# EAGLE board PATHS 1.1 PCB1 (EAGLE 6.5.0)
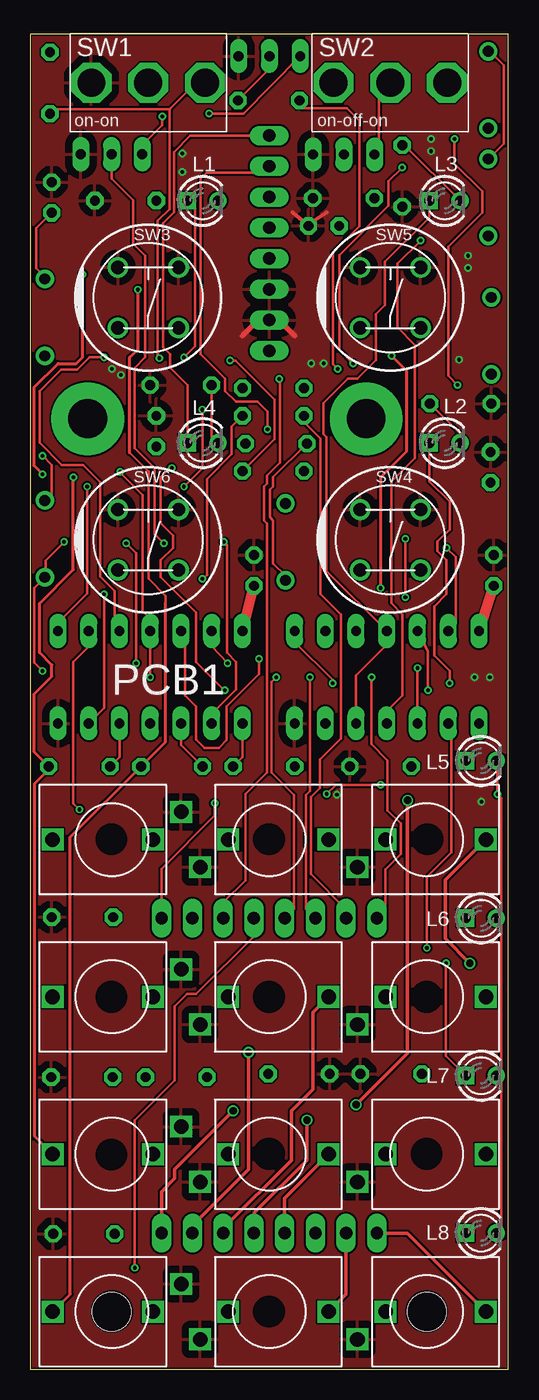
[diagram p0: board, top side]
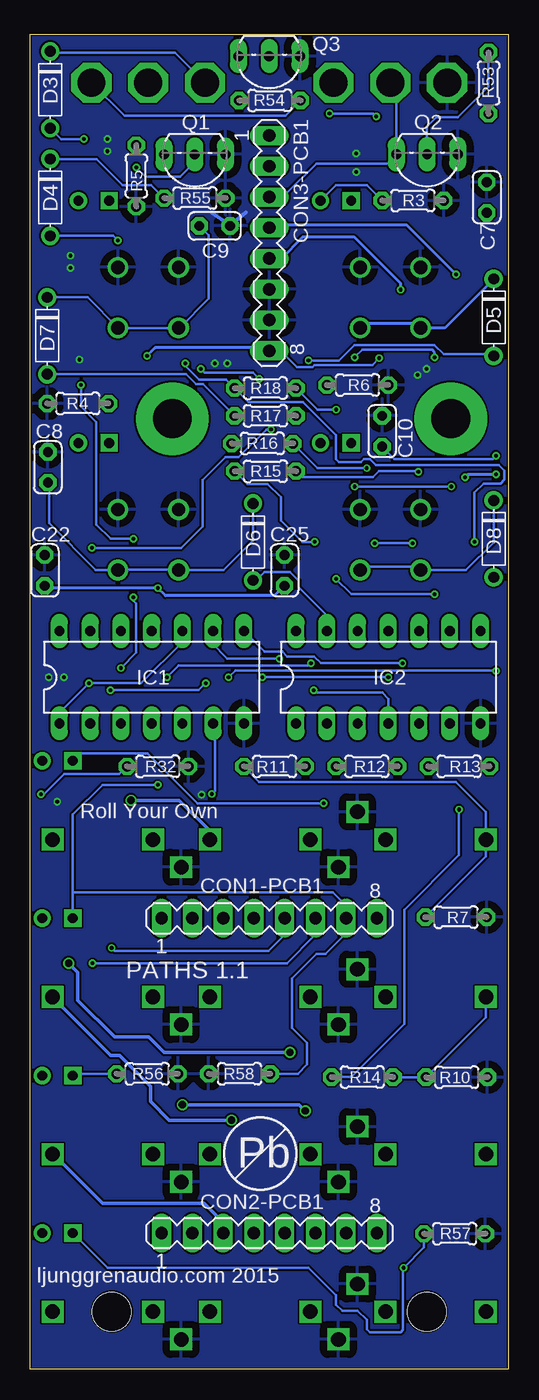
[diagram p1: board, bottom side, seen from below]

Size 39.5 x 110.25 mm. Coordinates in mm from the lower left corner, seen from the top.
Outline: 0,0 39.5,0 39.5,110.25 0,110.25 0,0
Copper layers (1*16): Top 0.035mm / dielectric 1.5mm / Bottom 0.035mm
Design rules "hackvana 15 mil pads 24 mil thermal *": minimum track width 6mil, minimum drill 0.3mm, track to track 6mil, track to pad 6mil, pad to pad 6mil, via to via 6mil, smd to smd 0mil, copper to edge 6mil, drill to drill 6mil, minimum pad ring 12mil, minimum via ring 6mil, stop-mask expansion 2mil, vias tented up to drill 100mil, thermal gap 24mil
Holes 3.2 mm at 6.74,4.76 32.77,4.76
tRestrict: area 18.5,16.6 to 20.9,19; area 5.5,16.5 to 7.9,18.9; area 31.5,16.6 to 33.9,19; area 18.5,3.6 to 20.9,6; area 5.5,29.5 to 7.9,31.9; area 18.5,29.5 to 20.9,31.9; area 31.5,29.5 to 33.9,31.9; area 31.6,42.6 to 34,45; area 18.5,42.6 to 20.9,45; area 5.5,42.6 to 7.9,45

## Footprints (pad centres in the part's own frame; a part is rotated, then mirrored left to right if it is on the bottom)
C025-024X044 = drill 0.813 octagon: 1 -1.27,0; 2 1.27,0
MA08-1 = drill 1.016 long: 1 -8.89,0; 2 -6.35,0; 3 -3.81,0; 4 -1.27,0; 5 1.27,0; 6 3.81,0; 7 6.35,0; 8 8.89,0
DO35-6 = drill 0.9: ANODE 3.175,0; CATHODE -3.175,0
THONKICON-TWISTED = drill 1.2 square: NORMAL 0,-3.4; RING 2.286,-5.715; TIP 0,4.9
DIL14 = drill 0.813 long: 1 -7.62,-3.81; 2 -5.08,-3.81; 3 -2.54,-3.81; 4 0,-3.81; 5 2.54,-3.81; 6 5.08,-3.81; 7 7.62,-3.81; 8 7.62,3.81; 9 5.08,3.81; 10 2.54,3.81; 11 0,3.81; 12 -2.54,3.81; 13 -5.08,3.81; 14 -7.62,3.81
LED3MM = drill 0.813 square: A -1.27,0 | drill 0.813: K 1.27,0
TO92-LINE = drill 0.813 long: 1 2.54,0; 2 0,0; 3 -2.54,0
0204/5 = drill 0.813 octagon: 1 -2.54,0; 2 2.54,0
SPDT-HORIZONTAL-TOP-SUBMINI-MULTICOMP = drill 2.3 pad 3.1 octagon: 1 4.7,0; 2 0,0; 3 -4.7,0
TACTILE_CK = drill 1.1: P$1 -2.5,2.5; P$2 2.5,2.5; P$3 -2.5,-2.5; P$4 2.5,-2.5

## Placement (x,y rotation side)
C7  10nF  [C025-024X044]  1.78,96.77 90 bottom
C8  10nF  [C025-024X044]  38.04,74.49 90 bottom
C9  10nF  [C025-024X044]  24.26,94.42 0 bottom
C10  10nF  [C025-024X044]  10.42,77.47 90 bottom
C22  100nF  [C025-024X044]  38.29,65.98 90 bottom
C25  100nF  [C025-024X044]  18.48,65.98 90 bottom
CON1-PCB1  [MA08-1]  19.75,37.24 0 bottom
CON2-PCB1  [MA08-1]  19.75,11.24 0 bottom
CON3-PCB1  [MA08-1]  19.75,93 270 bottom
D3  1N4148  [DO35-6]  37.85,105.66 270 bottom
D4  1N4148  [DO35-6]  37.85,96.77 270 bottom
D5  1N4148  [DO35-6]  1.21,86.87 270 bottom
D6  1N4148  [DO35-6]  21.09,68.33 270 bottom
D7  1N4148  [DO35-6]  38.1,85.34 270 bottom
D8  1N4148  [DO35-6]  1.21,68.58 270 bottom
FWD  ERTHENVAR_3.5MM_JACKINLINE2  [THONKICON-TWISTED]  6.75,4.75 90 top
HLD  ERTHENVAR_3.5MM_JACKINLINE2  [THONKICON-TWISTED]  6.75,43.75 90 top
I/O1  ERTHENVAR_3.5MM_JACKINLINE2  [THONKICON-TWISTED]  19.75,43.75 270 top
I/O2  ERTHENVAR_3.5MM_JACKINLINE2  [THONKICON-TWISTED]  19.75,30.75 270 top
I/O3  ERTHENVAR_3.5MM_JACKINLINE2  [THONKICON-TWISTED]  19.75,17.75 270 top
I/O4  ERTHENVAR_3.5MM_JACKINLINE2  [THONKICON-TWISTED]  19.75,4.75 270 top
IC1  4081N  [DIL14]  29.47,57.15 0 bottom
IC2  40106N  [DIL14]  9.91,57.15 0 bottom
L1  green  [LED3MM]  14.25,96.5 0 top
L2  green  [LED3MM]  34.25,76.5 0 top
L3  green  [LED3MM]  34.25,96.5 0 top
L4  green  [LED3MM]  14.25,76.5 0 top
L5  orange  [LED3MM]  37.25,50.25 0 top
L6  orange  [LED3MM]  37.25,37.25 0 top
L7  orange  [LED3MM]  37.25,24.25 0 top
L8  orange  [LED3MM]  37.25,11.25 0 top
O/I1  ERTHENVAR_3.5MM_JACKINLINE2  [THONKICON-TWISTED]  32.75,43.75 270 top
O/I2  ERTHENVAR_3.5MM_JACKINLINE2  [THONKICON-TWISTED]  32.75,30.75 270 top
O/I3  ERTHENVAR_3.5MM_JACKINLINE2  [THONKICON-TWISTED]  32.75,17.75 270 top
O/I4  ERTHENVAR_3.5MM_JACKINLINE2  [THONKICON-TWISTED]  32.75,4.75 270 top
Q1  FJN3303R  [TO92-LINE]  25.91,100.33 180 bottom
Q2  FJN3303R  [TO92-LINE]  6.71,100.34 180 bottom
Q3  FJN3303R  [TO92-LINE]  19.76,108.45 180 bottom
R3  470R  [0204/5]  7.88,96.52 0 bottom
R4  470R  [0204/5]  35.56,79.76 180 bottom
R5  470R  [0204/5]  30.74,98.55 270 bottom
R6  470R  [0204/5]  12.45,81.28 0 bottom
R7  100k  [0204/5]  4.32,37.34 0 bottom
R10  100k  [0204/5]  4.26,24.12 0 bottom
R11  100k  [0204/5]  19.31,49.78 0 bottom
R12  100k  [0204/5]  11.69,49.78 180 bottom
R13  100k  [0204/5]  4.07,49.78 180 bottom
R14  100k  [0204/5]  12.06,24.13 180 bottom
R15  10k  [0204/5]  20.07,74.17 0 bottom
R16  10k  [0204/5]  20.32,76.45 180 bottom
R17  10k  [0204/5]  20.07,78.74 180 bottom
R18  10k  [0204/5]  20.07,81.03 180 bottom
R32  470R  [0204/5]  28.96,49.78 180 bottom
R53  10k  [0204/5]  1.63,106.22 270 bottom
R54  10k  [0204/5]  19.7,104.79 180 bottom
R55  100k  [0204/5]  25.89,96.72 0 bottom
R56  100k  [0204/5]  29.83,24.4 0 bottom
R57  100k  [0204/5]  4.43,11.19 0 bottom
R58  100k  [0204/5]  22.21,24.4 180 bottom
RES  ERTHENVAR_3.5MM_JACKINLINE2  [THONKICON-TWISTED]  6.75,30.75 90 top
REV  ERTHENVAR_3.5MM_JACKINLINE2  [THONKICON-TWISTED]  6.75,17.75 90 top
SW1  SPDT on/on  [SPDT-HORIZONTAL-TOP-SUBMINI-MULTICOMP]  9.75,106.25 0 top
SW2  SPDT on/off/on  [SPDT-HORIZONTAL-TOP-SUBMINI-MULTICOMP]  29.75,106.25 0 top
SW3  TACTILE_C&K  [TACTILE_CK]  9.75,88.5 0 top
SW4  TACTILE_C&K  [TACTILE_CK]  29.75,68.5 0 top
SW5  TACTILE_C&K  [TACTILE_CK]  29.75,88.5 0 top
SW6  TACTILE_C&K  [TACTILE_CK]  9.75,68.5 0 top

## Library data of the parts
C7-C10 C22 C25 D3-D8 FWD HLD I/O1-I/O4 IC1 IC2 L1-L8 O/I1-O/I4 Q1-Q3 R3-R7 R10-R18 R32 R53-R58 RES REV SW1-SW6 = Roll Your Own
CON1-PCB1 CON2-PCB1 CON3-PCB1 = Roll Your Own; OC_FARNELL: unknown; OC_NEWARK: unknown

## Nets
0V: C7.2 C8.2 C9.2 C10.2 C22.2 C25.2 CON3-PCB1.6 CON3-PCB1.7 FWD.RING HLD.RING I/O1.RING I/O2.RING I/O3.RING I/O4.RING IC1.7 IC2.7 O/I1.RING O/I2.RING O/I3.RING O/I4.RING Q1.3 Q2.3 Q3.3 R3.2 R4.2 R5.2 R6.2 R7.2 R10.2 R32.1 R55.2 R56.2 R57.2 R58.2 RES.RING REV.RING SW1.3 SW3.P$1 SW3.P$2 SW4.P$1 SW4.P$2 SW5.P$1 SW5.P$2 SW6.P$1 SW6.P$2
+5V: C22.1 C25.1 CON3-PCB1.8 IC1.14 IC2.14 R53.2 SW1.1
BDF3R2T: C9.1 D7.CATHODE SW5.P$3 SW5.P$4
CV-MODE-1: CON3-PCB1.3 Q2.1 Q3.1 SW1.2
CV-MODE-INV: IC1.8 IC1.12 Q2.2 R53.1
CV-RECTIFIED-IN-1: CON3-PCB1.4 R13.1 REV.TIP
CV-STRAIGHT-IN-1: CON3-PCB1.5 FWD.TIP R12.1
DFGT43: C8.1 D6.CATHODE SW4.P$3 SW4.P$4
F-L: IC1.1 IC1.10 L2.A
FWD-1: CON1-PCB1.1 D6.ANODE IC2.13 R16.2
FWD-LED: IC1.9 IC2.12
HLD-1: CON1-PCB1.4 D5.ANODE IC2.11 R15.2
IO1-1: CON2-PCB1.8 I/O1.TIP
IO2-1: CON2-PCB1.6 I/O2.TIP
IO3-1: CON2-PCB1.4 I/O3.TIP
IO4-1: CON2-PCB1.2 I/O4.TIP
L1-1: CON1-PCB1.8 L5.A
L2-1: CON1-PCB1.7 IC1.6 L6.A R58.1
L3-1: CON1-PCB1.6 L7.A R54.2 R56.1
L4-1: CON1-PCB1.5 IC1.2 L8.A R57.1
N$3: IC2.3 R12.2
N$7: L2.K R4.1
N$8: HLD.TIP R7.1 R11.1
N$10: IC2.4 R16.1
N$11: IC2.6 R17.1
N$12: R10.1 R14.1 RES.TIP
N$14: L1.K R3.1
N$15: L3.K R5.1
N$16: IC2.8 R18.1
N$17: C10.1 D8.CATHODE SW6.P$3 SW6.P$4
N$18: IC2.10 L1.A
N$19: D3.ANODE IC1.3
N$20: L4.K R6.1
N$21: IC2.5 R13.2
N$26: IC2.9 R14.2
N$27: IC2.2 R15.1
N$28: C7.1 D5.CATHODE SW3.P$3 SW3.P$4
N$30: D4.ANODE IC1.4
N$40: L5.K L6.K L7.K L8.K R32.2
N$47: D3.CATHODE D4.CATHODE R55.1 SW2.3
N$51: IC2.1 R11.2
N$60: Q3.2 R54.1 SW2.1
OI1-1: CON2-PCB1.7 O/I1.TIP
OI2-1: CON2-PCB1.5 O/I2.TIP
OI3-1: CON2-PCB1.3 O/I3.TIP
OI4-1: CON2-PCB1.1 O/I4.TIP
R-L: IC1.5 IC1.11 L3.A
RES-1: CON1-PCB1.3 D8.ANODE Q1.2 R18.2
RES-LED-1: CON3-PCB1.1 L4.A
REV-1: CON1-PCB1.2 D7.ANODE R17.2
REV-LED-1: CON3-PCB1.2 IC1.13
STEP-LIMIT: Q1.1 SW2.2

## Tracks (layer width: path | path; a pad name or v marks a point on that pad's centre or on a via)
0V  (via drill 0.3)
  Top 0.35: 24.49,95.52 22.97,94.5 21.7,95.52
  Top 0.406: 20.83,86.36 21.85,85.34 | 18.55,86.36 17.53,85.34
  Bottom 0.35: 24.49,95.52 22.97,94.5 21.7,95.52
  other vias: 6.74,82.61 37.98,57.15 12.58,98.87 23.22,83.07 24.24,83.07 35.44,83.38 25.34,47.43 36.71,57.15 37.28,46.86 7.5,82.11 12.58,100.39 33.13,101.61 33.13,100.6 36.18,91.96 36.18,90.94
  pour Top: -0.25,111.25 39.63,111.25 39.63,-0.25 -0.25,-0.25
  pour Bottom: -0.25,111.51 39.88,111.51 39.88,-0.25 -0.25,-0.25
+5V  (via drill 0.3)
  Top 0.22: v10.67,83.5 10.52,83.65 10.52,94.85 11.5,95.82 11.5,104.05 | 11.5,104.05 11.54,104.09 13.7,106.25 SW1.1 | R53.2 2,104.05 11.5,104.05
  Top 0.254: v28.96,64.52 28.96,73.66 31.12,75.82 31.12,82.42 v29.85,83.69
  Top 0.813: IC2.14 C25.1 | IC1.14 C22.1
  Bottom 0.22: CON3-PCB1.8 19.71,84.07 18.8,84.07 17.47,82.74 16.2,82.74 16.01,82.93 11.24,82.93 v10.67,83.5
  Bottom 0.254: C25.1 19.31,63.88 28.32,63.88 v28.96,64.52 38.1,64.52 C22.1 | CON3-PCB1.8 21.12,84.36 29.18,84.36 v29.85,83.69
BDF3R2T
  Bottom 0.22: D7.CATHODE 34.77,88.52 SW5.P$4 SW5.P$3 27.15,86 24.75,88.4 24.75,93.64 C9.1
CV-MODE-1  (via drill 0.3)
  Top 0.22: Q3.1 17.63,103.71 v14.78,103.71 | v10.9,103.45 10.9,102.75 9.25,101.1 Q2.1
  Bottom 0.22: CON3-PCB1.3 19.71,96.77 19.45,97.04 18.4,97.04 15.86,99.58 9.76,99.58 9.25,100.09 Q2.1 9.25,105.75 SW1.2 | v14.78,103.71 11.16,103.71 v10.9,103.45
CV-MODE-INV  (via drill 0.3)
  Top 0.22: IC1.12 32.87,59.33 v32.87,56.08 | v25,56.65 25,56.91 21.85,60.06 IC1.8 | Q2.2 6.71,98.31 8.49,96.53 8.49,92.98 9.51,91.96 9.51,83.58 8.62,82.69 8.62,76.08 10.27,74.43 10.27,68.97 v11.03,68.21 | v7.92,68.21 8.74,67.39 v8.74,58.3
  Bottom 0.22: v32.87,56.08 25.57,56.08 v25,56.65 | R53.1 1.63,105.93 4.17,103.39 5.95,103.39 6.71,102.63 Q2.2 | IC1.8 20.14,59.26 18.65,59.26 18.27,58.88 16.05,58.88 15.47,58.3 v8.74,58.3 | v7.92,68.21 v11.03,68.21
CV-RECTIFIED-IN-1  (via drill 0.3)
  Top 0.22: REV.TIP 1.78,17.82 | 1.53,49.53 R13.1
  Top 0.254: 1.53,49.53 0.39,48.39 0.39,19.21 REV.TIP | R13.1 0.32,50.99 0.32,55.75 1.78,57.21 1.78,58.17 0.77,59.18 0.77,63.25 3.56,66.04 v3.56,73.66 | v1.02,73.91 0.32,74.61 0.32,81.09 2.29,83.06 3.81,83.06 4.32,83.57 v4.32,90.42
  Bottom 0.22: 18.55,94.49 18.76,94.27 CON3-PCB1.4
  Bottom 0.254: v3.56,73.66 3.31,73.91 v1.02,73.91 | v4.32,90.42 8.39,94.49 18.55,94.49
CV-STRAIGHT-IN-1  (via drill 0.3)
  Top 0.22: FWD.TIP 1.78,4.82 | 8.2,75.69 9.76,74.13 9.76,65.29 11.18,63.87 11.18,63.31
  Top 0.254: 11.18,63.31 11.18,51.82 R12.1 3.31,43.94 3.31,6.21 FWD.TIP | 8.2,75.69 8.2,83.58 8.24,83.58 8.89,84.24 v8.89,89.15
  Bottom 0.22: 19.71,91.69 CON3-PCB1.5
  Bottom 0.254: v8.89,89.15 8.89,89.66 12.7,93.47 17.02,93.47 18.8,91.69
  Bottom 0.305: 18.8,91.69 19.71,91.69
DFGT43
  Bottom 0.22: D6.CATHODE 21.09,68.44 23.53,66 SW4.P$3 27.81,66.05 31.86,66.05 32.25,66.17 SW4.P$4 34.09,66 37.95,69.86 37.95,73.13 C8.1
F-L  (via drill 0.3)
  Top 0.22: v34.65,56.65 34.65,57.67 33.38,58.94 33.38,63 34.4,64.02 34.4,66.81 33.64,67.58 33.64,68.34 34.65,69.35 34.65,71.64 32.98,73.31 L2.A
  Bottom 0.22: IC1.10 26.93,60.06 30.33,56.65 v34.65,56.65 36.94,54.37 36.94,53.49 IC1.1
FWD-1  (via drill 0.3)
  Top 0.22: CON1-PCB1.1 28.67,37.24 29.34,37.91 29.34,41.27 30.61,42.55 30.61,45.09 29.53,46.16 29.53,50.29 28.2,51.63 v28.2,57.15 | R16.2 20.07,73.66 20.07,72.9 19.82,72.64 19.82,70.36 20.07,70.1 20.07,66.55 21.09,65.53 D6.ANODE | v16.3,58.3 14.99,59.74 IC2.13
  Bottom 0.22: v28.2,57.15 27.25,58.1 16.51,58.1 16.38,58.24 v16.3,58.3 | IC2.13 14.99,62.23 17.34,64.58 17.34,65.15 18.04,65.85 20.13,65.85 20.83,65.15 D6.ANODE
FWD-LED  (via drill 0.3)
  Top 0.22: IC2.12 12.81,60.6 12.81,55.64 13.7,54.75 13.7,52.02 14.4,51.32 15.6,51.32 16.24,51.95 16.24,54.75 18.9,57.42 v18.9,58.69
  Bottom 0.22: v18.9,58.69 23.22,58.69 24.49,59.96 24.49,60.86 IC1.9
HLD-1  (via drill 0.3)
  Top 0.22: CON1-PCB1.4 21.79,38.01 21.79,47.43 19.94,49.28 19.94,56.77 v20.32,57.15 | v9.91,57.15 IC2.11 9.91,61.98 9.28,62.61 9.28,72.2 7.5,73.98 7.5,74.04 v7.43,74.11 | R15.2 20.2,76.83 20.2,80.07 16.96,83.31 v16.51,83.31
  Bottom 0.22: v20.32,57.15 v9.91,57.15 | v16.51,83.31 13.97,83.31 12.7,84.58 6.1,84.58 5.34,83.82 1.34,83.82 D5.ANODE | v7.43,74.11 7.5,74.17 10.67,74.17 11.18,73.66 17.02,73.66 R15.2
IO1-1  (via drill 0.6)
  Top 0.305: CON2-PCB1.8 10.86,14.67 11.94,15.75 11.94,16.51 v16.77,21.34 | v26.93,21.84 31.18,26.1 v31.18,46.99
  Bottom 0.305: v16.77,21.34 17.28,21.84 v26.93,21.84 | v31.18,46.99 27.18,46.99 24.64,44.45 I/O1.TIP
IO2-1
  Top 0.305: CON2-PCB1.6 15.94,11.62 21.59,17.27 21.59,21.34 23.37,23.11 23.37,29.47 I/O2.TIP
IO3-1
  Top 0.305: CON2-PCB1.4 21.02,14.12 I/O3.TIP
IO4-1
  Top 0.305: I/O4.TIP 26.1,6.2 CON2-PCB1.2
L1-1  (via drill 0.3)
  Top 0.22: v15.24,46.74 15.24,45.72 10.86,41.34 CON1-PCB1.8
  Bottom 0.22: L5.A 35.37,50.86 29.79,50.86 25.66,46.74 v15.24,46.74
L2-1  (via drill 0.3)
  Top 0.22: v28.96,48.26 25.24,48.26 v24.49,47.51
  Bottom 0.22: L6.A 35.98,39.37 | 35.98,39.37 35.98,45.81 33.53,48.26 v28.96,48.26 | 35.98,39.37 14.48,39.37 13.4,38.29 CON1-PCB1.7 13.32,37.16 13.32,36.08 15.09,34.3 15.86,34.3 17.89,32.27 17.89,28.21 16.62,26.94 16.62,25.16 17.38,24.4 R58.1 | v24.49,47.51 24.24,47.76 24.24,52.59 24.39,52.74 IC1.6
L3-1  (via drill 0.3)
  Top 0.22: L7.A 34.36,25.87 v34.36,33.53 | CON1-PCB1.6 15.94,38.54 17.78,40.39 17.78,47.5 19.56,49.28 19.56,69.85 19.31,70.1 19.31,72.9 19.56,73.15 19.56,73.82 20.62,74.88 20.62,81.74 v20.58,81.79 | v25.4,82.61 25,83.02 25,92.21 27.18,94.4 27.18,103.12 26.15,104.15 22.46,104.15 22.24,104.37 R54.2
  Bottom 0.22: v34.36,33.53 18.29,33.53 16.01,35.81 16.01,37.17 CON1-PCB1.6 | v20.58,81.79 21.09,82.3 25,82.31 25.1,82.31 v25.4,82.61 | R56.1 35.83,24.4 L7.A
L4-1  (via drill 0.3)
  Top 0.22: v8.64,8.38 8.64,20.57 11.94,23.88 11.94,29.97 12.96,30.99 13.72,30.99 18.48,35.75 CON1-PCB1.5 | v32.77,34.8 32.77,40.64 34.8,42.67 34.8,52.58 IC1.2
  Bottom 0.22: L8.A 33.11,8.38 16.51,8.38 14.23,6.1 14.23,5.33 13.72,4.83 12.45,4.83 11.69,4.06 11.69,3.3 11.43,3.05 8.89,3.05 8.7,3.24 8.7,8.32 v8.64,8.38 6.97,10.06 R57.1 | CON1-PCB1.5 18.55,37.17 18.55,35.81 19.82,34.54 32.52,34.54 v32.77,34.8
N$3
  Top 0.22: R12.2 12.45,51.56 IC2.3
N$7
  Top 0.22: L2.K 35.52,77.26 R4.1
N$8
  Bottom 0.22: R7.1 1.85,42.35 HLD.TIP 1.85,46.04 4.32,48.51 20.58,48.51 R11.1
N$10  (via drill 0.3)
  Top 0.22: v16.07,56.07 13.72,58.42 13.72,62.48 10.78,65.43 10.78,66.81 11.79,67.83 11.79,68.85 10.78,69.86 10.78,73.67 11.53,74.42 v11.69,74.42
  Bottom 0.22: R16.1 15.75,74.42 v11.69,74.42 | v16.07,56.07 15.88,55.88 10.42,55.88 9.91,55.37 IC2.4
N$11  (via drill 0.3)
  Top 0.22: IC2.6 6.1,54.61 v6.1,64.01 | R17.1 16.64,77.85 16.64,75.56 14.61,73.53 14.61,65.6 14.29,65.28 v14.23,65.28
  Bottom 0.22: v6.1,64.01 12.96,64.01 v14.23,65.28
N$12
  Bottom 0.22: RES.TIP 1.85,29.07 R10.1 R14.1
N$14
  Bottom 0.22: L1.K 14.23,97.79 11.69,97.79 R3.1
N$15
  Top 0.22: L3.K 30.93,101.09 R5.1
N$16  (via drill 0.3)
  Top 0.22: IC2.8 2.29,61.66 4.7,64.07 v4.7,72.9 | v12.7,72.9 14.23,74.42 v14.23,79.25
  Bottom 0.22: v4.7,72.9 v12.7,72.9 | v14.23,79.25 15.75,79.25 R18.1
N$17  (via drill 0.3)
  Top 0.22: v1.02,75.44 1.78,74.68 1.78,72.33 D8.CATHODE
  Bottom 0.22: C10.1 9.4,75.18 1.27,75.18 v1.02,75.44 | D8.CATHODE 1.21,68.29 3.5,66 SW6.P$3 7.56,66.31 11.79,66.31 12.1,66 SW6.P$4
N$18  (via drill 0.3)
  Top 0.22: v6.1,83.57 4.89,83.57 3.88,82.55 2.54,82.55 0.77,80.77 0.77,76.52 2.61,74.68 4.39,74.68 5.78,73.28 5.78,65.46 6.97,64.27 6.97,61.36 IC2.10 | v12.7,83.57 13.63,84.5 13.63,95.83 12.98,96.49 L1.A
  Bottom 0.22: v12.7,83.57 12.07,84.2 6.29,84.2 6.1,84.01 v6.1,83.57
N$19  (via drill 0.3)
  Top 0.22: v30.99,63.75 v30.99,68.58 | v32.01,57.91 IC1.3 | v35.31,81.28 34.55,82.04 34.55,92.71 37.34,95.5 37.34,97.28 35.06,99.57 v35.06,101.6
  Bottom 0.22: v32.01,57.91 30.74,59.18 30.74,63.25 30.99,63.5 v30.99,63.75 | v35.31,81.28 35.31,79.5 34.04,78.23 34.04,69.76 32.87,68.59 31,68.59 v30.99,68.58 | v35.06,101.6 36.96,101.6 D3.ANODE
N$20
  Top 0.22: R6.1 14.99,77.03 L4.K
N$21
  Top 0.22: R13.2 7.37,50.55 IC2.5
N$26  (via drill 0.3)
  Top 0.22: v4.07,46.23 3.56,46.74 3.56,58.42 4.83,59.69 IC2.9
  Bottom 0.22: v4.07,46.23 4.07,42.48 8.6,37.95 8.6,28.5 12.97,24.13 R14.2
N$27  (via drill 0.3)
  Top 0.22: IC2.2 14.99,54.1 17.02,56.13 17.02,58.42 16.26,59.18 16.26,68.07 v16.01,68.33
  Bottom 0.22: v16.01,68.33 17.02,68.33 18.8,70.1 18.8,72.01 19.88,73.09 21.53,73.09 R15.1
N$28
  Top 0.22: C7.1 0.51,94.23 0.51,90.93 1.21,90.23 D5.CATHODE
  Bottom 0.254: D5.CATHODE 5.25,86 SW3.P$3 7.62,86.37 11.79,86.37 12.16,86 SW3.P$4
N$30  (via drill 0.3)
  Top 0.22: v32.26,93.22 30.33,91.29 30.33,86.06 31.79,84.59 31.79,75.26 29.83,73.29 29.83,63.26 30.74,62.35 30.74,55.63 29.47,54.36 IC1.4
  Bottom 0.22: D4.ANODE 32.64,93.6 v32.26,93.22
N$40  (via drill 0.3)
  Top 0.22: L5.K 38.61,50.16 v38.61,47.5 38.93,47.18 38.93,37.66 L6.K 38.93,36.84 38.93,24.66 L7.K 38.93,23.84 38.93,11.66 L8.K
  Bottom 0.22: R32.2 32.13,49.15 36.71,49.15 38.36,47.5 v38.61,47.5
N$44  (via drill 3.2 pad 6)
  other vias: 27.75,78.5
N$47
  Top 0.22: D4.CATHODE 39.12,101.22 39.12,107.7 37.85,108.97 D3.CATHODE
  Bottom 0.22: D3.CATHODE 37.81,108.84 37.7,108.72 27.52,108.72 SW2.3 | R55.1 29.51,97.8 31.86,97.8 34.01,99.95 D4.CATHODE
N$51
  Top 0.22: R11.2 17.53,50.55 IC2.1
N$60
  Top 0.22: R54.1 19.7,107.33 Q3.2
  Bottom 0.22: SW2.1 31.72,103.52 18.43,103.52 R54.1
N$400  (via drill 3.2 pad 6)
  other vias: 4.75,78.5
OI1-1  (via drill 0.6)
  Top 0.305: CON2-PCB1.7 13.4,11.87 18.04,16.51 v18.04,26.16 | v36.33,33.53 34.29,35.56 34.29,40.39 O/I1.TIP
  Bottom 0.305: v18.04,26.16 28.45,26.16 29.72,27.43 32.52,27.43 35.56,30.48 35.56,32.77 v36.33,33.53
OI2-1  (via drill 0.6)
  Top 0.305: CON2-PCB1.5 18.55,11.31 18.55,12.95 22.86,17.27 v22.86,20.57
  Bottom 0.305: v22.86,20.57 28.04,20.57 29.57,22.11 29.57,23.38 32.11,25.92 32.87,25.92 37.7,30.75 O/I2.TIP
OI3-1
  Bottom 0.305: CON2-PCB1.3 23.63,11.31 23.63,12.19 25.15,13.72 33.53,13.72 37.57,17.75 O/I3.TIP
OI4-1
  Top 0.305: O/I4.TIP 31.16,11.24 CON2-PCB1.1
R-L
  Top 0.22: IC1.5 26.93,57.31 29.32,59.7 29.32,60.81 IC1.11 24.49,65.94 24.49,76.97 24.24,77.23 24.24,79.77 26.27,81.8 27.03,81.8 28.56,83.32 28.56,87.13 29.32,87.9 29.32,91.45 32.98,95.11 L3.A
RES-1  (via drill 0.3)
  Top 0.22: v1.02,57.66 0.32,58.36 0.32,64.52 D8.ANODE 1.27,65.47 1.27,66.8 v2.8,68.33 | v23.12,57.15 23.12,47.75 22.8,47.43 22.8,38 CON1-PCB1.3 | v26.67,83.06 25.53,84.2 25.53,92.01 29.59,96.08 29.59,98.11 v30.74,99.25
  Bottom 0.22: v1.02,57.66 1.08,57.72 22.55,57.72 v23.12,57.15 | v26.67,83.06 26.74,82.93 25.53,81.72 23.31,81.72 R18.2 21.47,79.88 16.96,79.88 14.23,77.15 14.23,75.18 13.97,74.93 12.2,74.93 11.94,75.18 11.43,75.18 10.93,74.68 0.77,74.68 0.32,74.23 0.32,73.47 0.64,73.15 2.04,73.15 2.8,72.39 v2.8,68.33 | v30.74,99.25 29.98,98.49 27.12,98.49 25.91,99.69 Q1.2
RES-LED-1
  Top 0.22: L4.A 12.98,81.26 11.54,82.7 11.54,83.83 10.97,84.4 10.97,94.66 11.88,95.57 11.88,100.52 13.21,101.85 19.71,101.85 CON3-PCB1.1
REV-1
  Top 0.22: CON1-PCB1.2 26.1,37.98 23.18,40.89 23.18,47.24 23.94,48.01 23.94,50.35 25.66,52.07 25.66,62.35 23.98,64.02 23.98,76.85 22.71,78.12 22.71,78.64 R17.2 22.67,78.68
  Bottom 0.22: D7.ANODE 26.61,82.17 25.79,81.34 25.21,81.34 R17.2
REV-LED-1  (via drill 0.3)
  Top 0.22: v19.6,77.61 19.6,79.07 18.78,79.89 17,79.89 16.11,80.78 16.11,81.8 14.08,83.83 14.08,98.31 14.59,98.82 19.22,98.82 CON3-PCB1.2 | v34.4,67.83 35.16,67.07 35.16,61.73 34.55,61.12 IC1.13
  Bottom 0.22: v34.4,67.83 27.03,67.83 25.25,69.61 25.25,73.42 23.35,75.32 22.27,75.32 19.98,77.61 v19.6,77.61
STEP-LIMIT
  Top 0.22: SW2.2 28.81,105.31 28.81,101.36 28.45,101 Q1.1

## Text on the board
tPlace: on-on | on-off-on | PCB1
bPlace: Roll Your Own | PATHS 1.1 | Pb | ljunggrenaudio.com 2015